# EAGLE board 555LED (EAGLE 8.1.1)
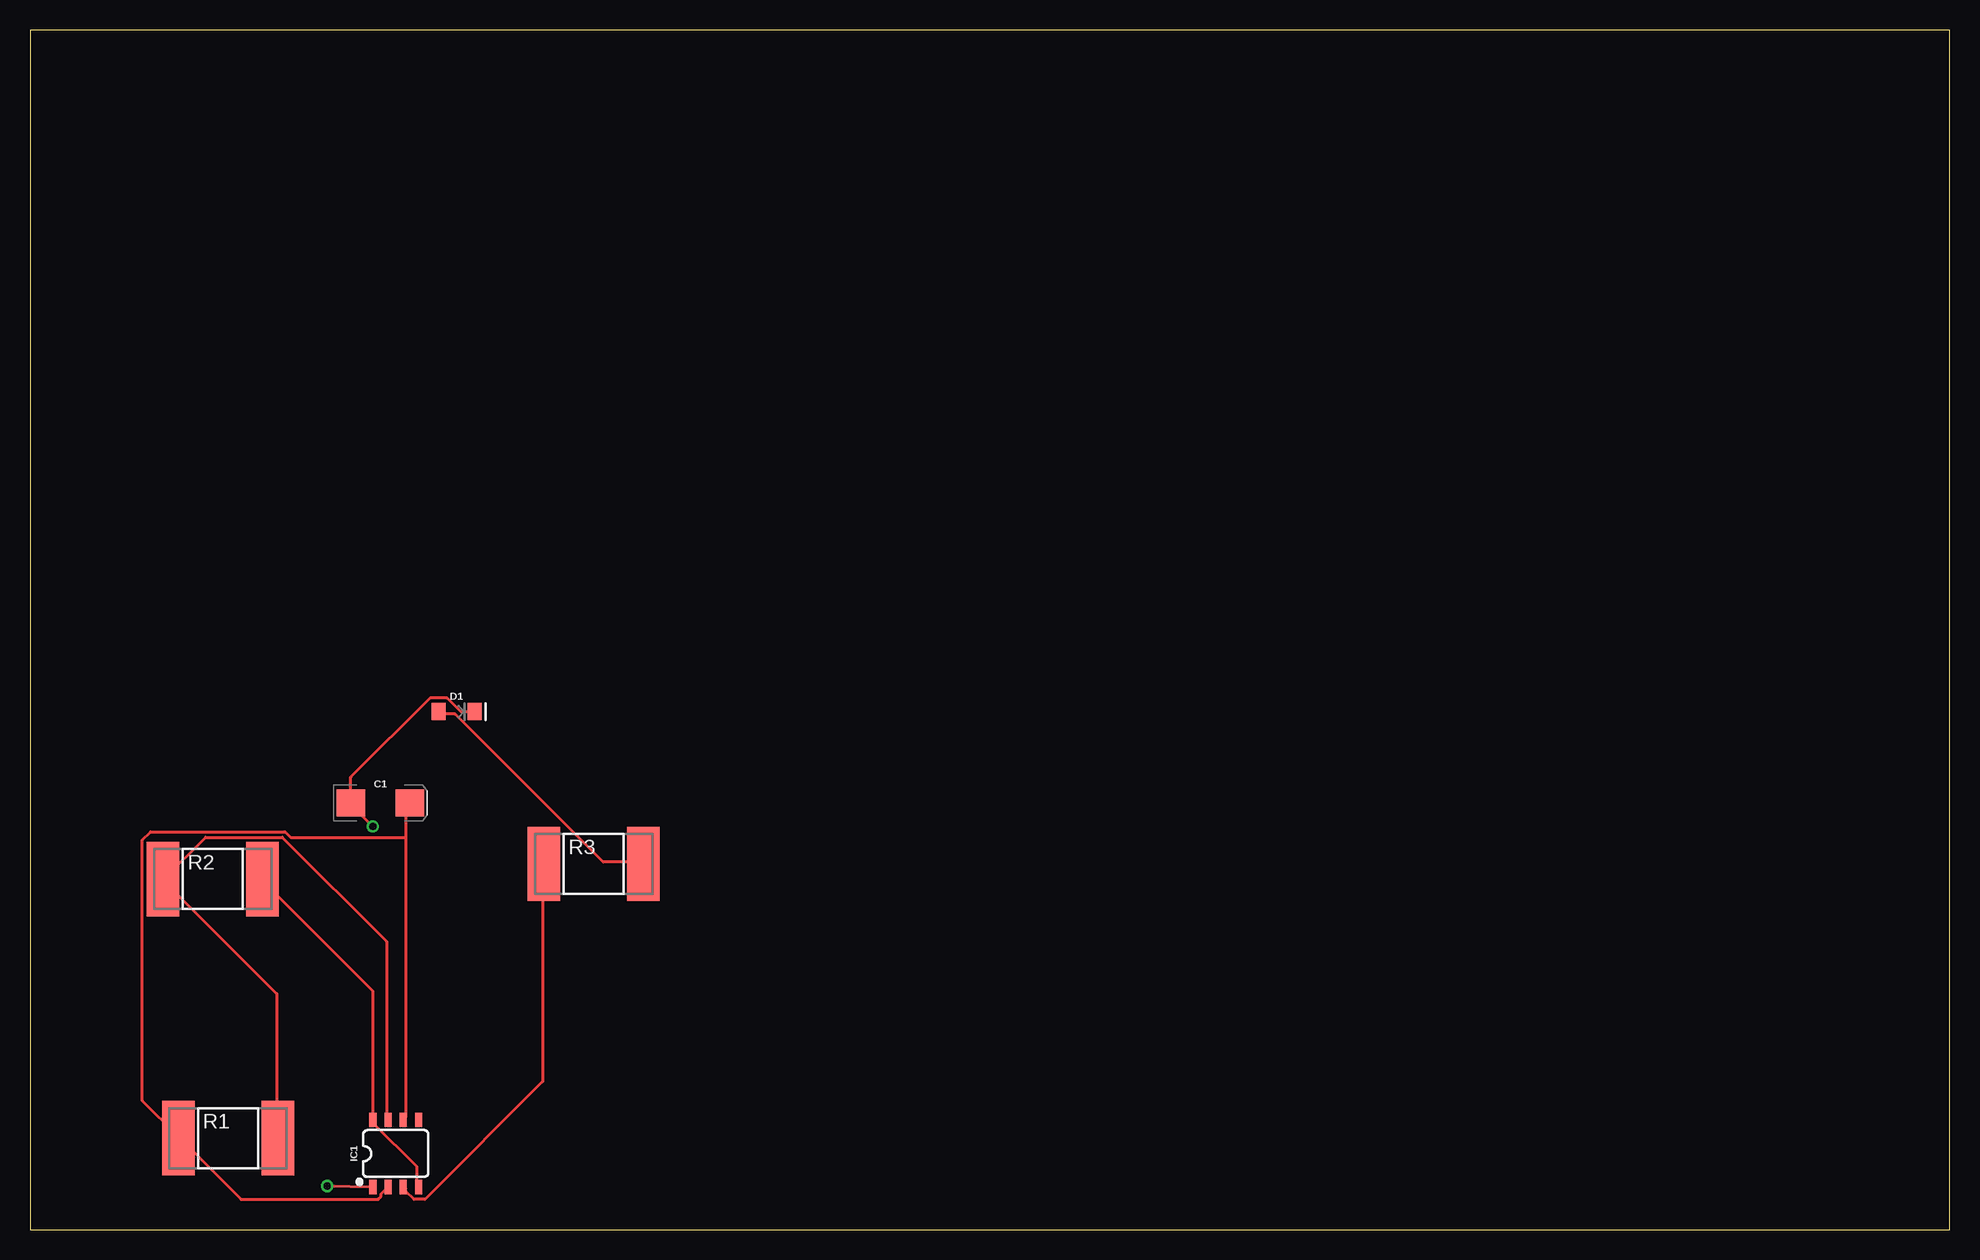
[diagram p0: board, top side]
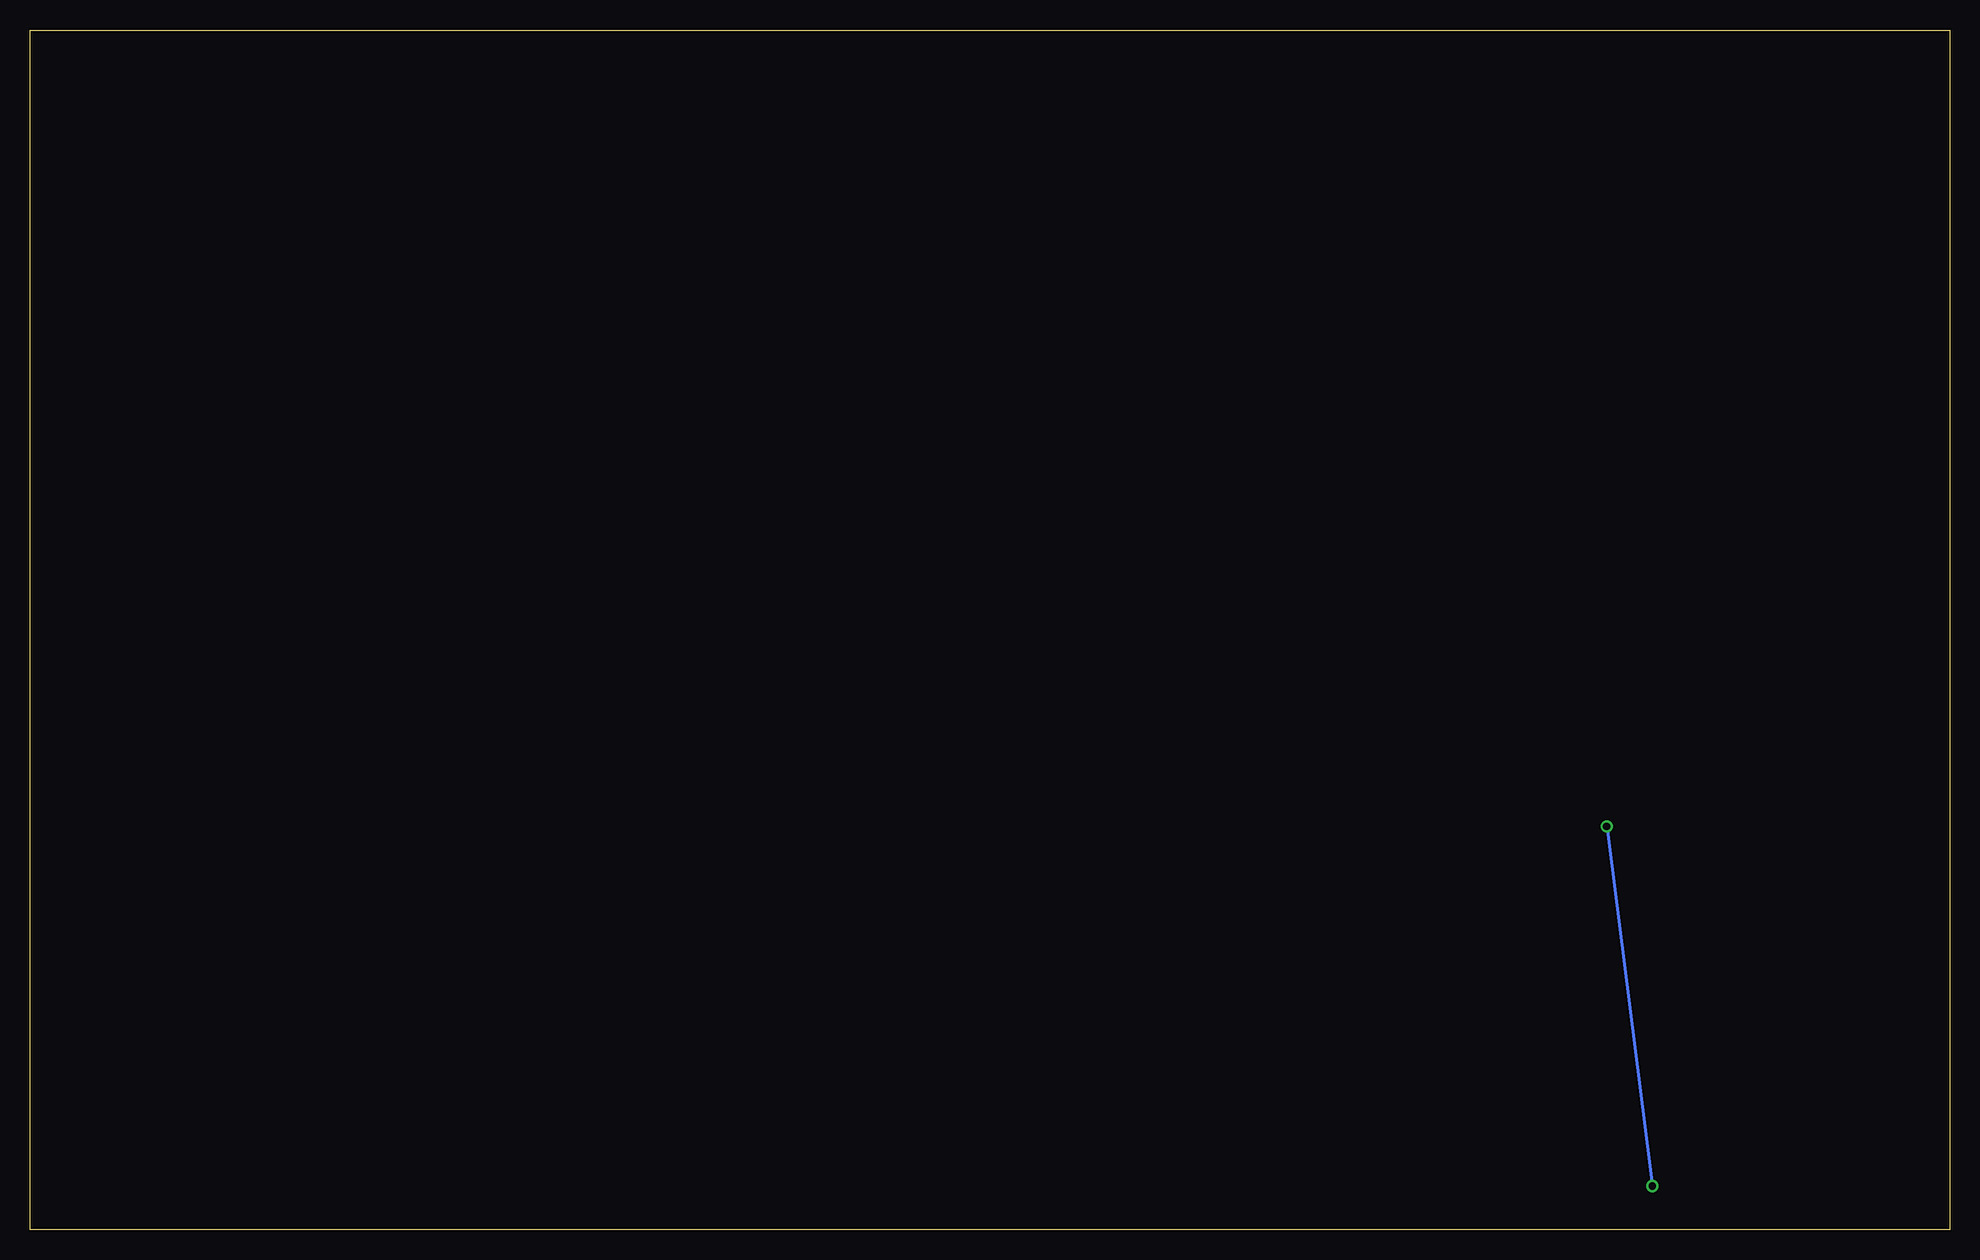
[diagram p1: board, bottom side, seen from below]

Size 160 x 100 mm. Coordinates in mm from the lower left corner, seen from the top.
Outline: 0,0 160,0 160,100 0,100 0,0
Copper layers (1*16): Top 0.035mm / dielectric 1.5mm / Bottom 0.035mm
Design rules "default": minimum track width 10mil, minimum drill 24mil, track to track 8mil, track to pad 8mil, pad to pad 8mil, via to via 8mil, smd to smd 8mil, copper to edge 40mil, drill to drill 8mil, minimum pad ring 10mil, minimum via ring 8mil, stop-mask expansion 4mil, vias tented up to drill 0mil, thermal gap 10mil

## Footprints (pad centres in the part's own frame; a part is rotated, then mirrored left to right if it is on the bottom)
EIA6032-NOM = smd 2.37 x 2.23: A 2.47,0; C -2.47,0
LED-1206 = smd 1.2 x 1.4: A -1.5,0; C 1.5,0
SO08 = smd 0.6 x 1.2: 1 -1.905,-2.8; 2 -0.635,-2.8; 3 0.635,-2.8; 4 1.905,-2.8; 5 1.905,2.8; 6 0.635,2.8; 7 -0.635,2.8; 8 -1.905,2.8
BVS = smd 2.7 x 6.2: 1 -4.14,0; 2 4.14,0

## Placement (x,y rotation side)
C1  10µF  [EIA6032-NOM]  29.21,35.56 0 top
D1  [LED-1206]  35.56,43.18 0 top
IC1  555  [SO08]  30.48,6.35 0 top
R1  470k  [BVS]  16.51,7.62 0 top
R2  1k  [BVS]  15.24,29.21 0 top
R3  1K  [BVS]  46.99,30.48 0 top

## Library data of the parts
C1 = SparkFun-Capacitors; PROD_ID: CAP-12984
D1 = SparkFun-LED
IC1 = SparkFun-IC-Special-Function; PROD_ID: NA-XXXXX
R1-R3 = resistor-shunt; OC_FARNELL: unknown; OC_NEWARK: unknown

## Nets
N$1: IC1.3 R3.1
N$2: D1.A R3.2
N$3: IC1.4 IC1.8 R2.2
N$4: C1.C D1.C IC1.1
N$5: C1.A IC1.2 IC1.6 R1.1
N$7: IC1.7 R1.2 R2.1

## Tracks (layer width: path | path; a pad name or v marks a point on that pad's centre or on a via)
N$1
  Top 0.254: IC1.3 31.32,3.43 31.32,3.2 32,2.52 32.92,2.52 42.75,12.34 42.75,30.4 R3.1
N$2
  Top 0.254: D1.A 34.06,42.98 35.43,42.98 47.78,30.63 50.98,30.63 R3.2
N$3
  Top 0.254: IC1.4 32.23,3.66 32.23,5.26 28.57,8.91 IC1.8 28.57,19.89 19.43,29.03 R2.2
N$4  (via drill 0.61)
  Top 0.254: v24.77,3.63 IC1.1 | v28.57,33.6 26.75,35.43 C1.C 26.75,35.66 26.75,37.72 33.38,44.35 34.75,44.35 35.89,43.2 37.03,43.2 D1.C
  Bottom 0.254: v28.57,33.6 v24.77,3.63
N$5
  Top 0.254: 31.32,32.69 31.32,35.2 31.55,35.43 C1.A | 31.32,32.69 31.32,9.37 IC1.6 | IC1.2 29.72,3.43 29.26,2.97 29.26,2.74 29.03,2.52 17.6,2.52 12.57,7.54 R1.1 12.34,7.77 9.37,10.74 9.37,32.46 10.06,33.15 21.26,33.15 21.72,32.69 31.32,32.69
N$7
  Top 0.254: IC1.7 29.72,9.37 29.72,24 21.03,32.69 14.63,32.69 11.2,29.26 R2.1 11.2,29.03 20.57,19.66 20.57,7.77 R1.2